# EAGLE board invert-opamp (EAGLE 9.5.1)
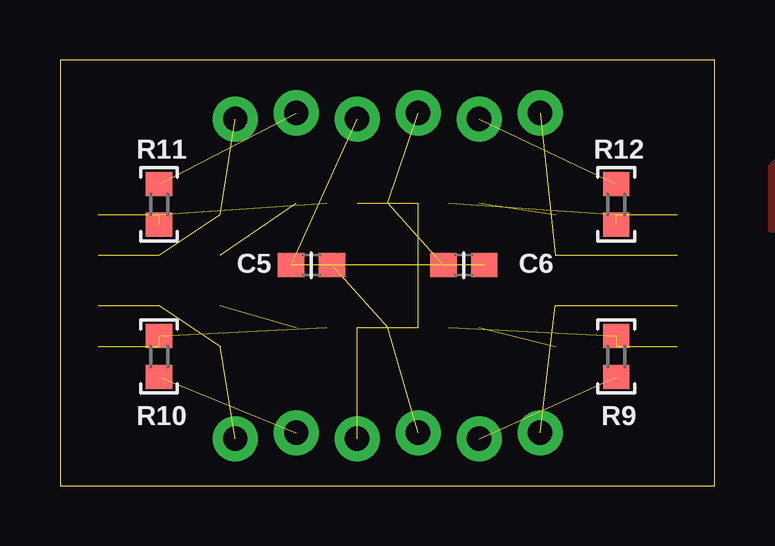
[diagram p0: board, top side]
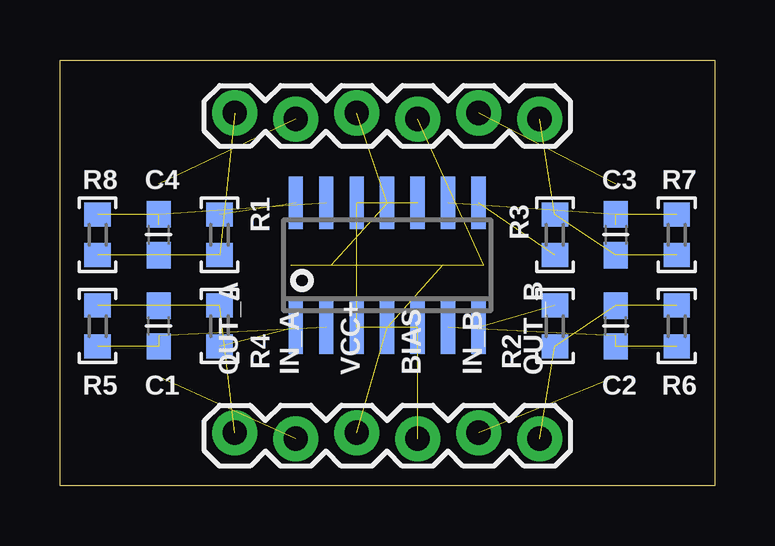
[diagram p1: board, bottom side, seen from below]

Size 27.29 x 17.77 mm. Coordinates in mm from the lower left corner, seen from the top.
Outline: 0,0 27.29,0 27.29,17.77 0,17.77 0,0
Copper layers (1*16): Top 0.035mm / dielectric 1.5mm / Bottom 0.035mm
Design rules "default": minimum track width 6mil, minimum drill 0.35mm, track to track 6mil, track to pad 6mil, pad to pad 6mil, via to via 6mil, smd to smd 6mil, copper to edge 40mil, drill to drill 6mil, minimum pad ring 10mil, minimum via ring 8mil, stop-mask expansion 4mil, vias tented up to drill 0mil, thermal gap 10mil

## Footprints (pad centres in the part's own frame; a part is rotated, then mirrored left to right if it is on the bottom)
C0603 = smd 1.1 x 1: 1 -0.85,0; 2 0.85,0
SO14 = smd 0.6 x 2.2: 1 -3.81,-2.6; 2 -2.54,-2.6; 3 -1.27,-2.6; 4 0,-2.6; 5 1.27,-2.6; 6 2.54,-2.6; 7 3.81,-2.6; 8 3.81,2.6; 9 2.54,2.6; 10 1.27,2.6; 11 0,2.6; 12 -1.27,2.6; 13 -2.54,2.6; 14 -3.81,2.6
1X06_LOCK = drill 1.016 pad 1.88: 1 0,0; 2 2.54,-0.254; 3 5.08,0; 4 7.62,-0.254; 5 10.16,0; 6 12.7,-0.254
R0603 = smd 1 x 1.1: 1 -0.85,0; 2 0.85,0

## Placement (x,y rotation side)
C1  18pF  [C0603]  23.18,6.67 90 bottom
C2  18pF  [C0603]  4.13,6.67 90 bottom
C3  18pF  [C0603]  4.13,10.48 270 bottom
C4  18pF  [C0603]  23.18,10.48 270 bottom
C5  [C0603]  10.48,9.21 0 top
C6  [C0603]  16.83,9.21 0 top
IC1  OPAMP-TL074D  [SO14]  13.65,9.21 0 bottom
J1  [1X06_LOCK]  20,2.22 0 bottom
J2  [1X06_LOCK]  20,15.56 0 bottom
R1  220R  [R0603]  20.64,6.67 90 bottom
R2  220R  [R0603]  6.67,6.67 270 bottom
R3  220R  [R0603]  6.67,10.48 90 bottom
R4  220R  [R0603]  20.64,10.48 270 bottom
R5  100k  [R0603]  25.72,6.67 90 bottom
R6  100k  [R0603]  1.59,6.67 90 bottom
R7  100k  [R0603]  1.59,10.48 270 bottom
R8  100k  [R0603]  25.72,10.48 270 bottom
R9  24k  [R0603]  23.18,5.4 90 top
R10  24k  [R0603]  4.13,5.4 90 top
R11  24k  [R0603]  4.13,11.75 270 top
R12  24k  [R0603]  23.18,11.75 270 top

## Library data of the parts
C1-C6 IC1 R1-R12 = 0000-master
J1 J2 = SparkFun-Connectors

## Nets
IN_A: J1.2 R9.1
IN_B: J1.5 R10.1
IN_C: J2.5 R11.1
IN_D: J2.2 R12.1
N$1: C1.1 IC1.2 R5.1 R9.2
N$2: IC1.1 R1.1
N$4: IC1.8 R3.1
N$5: C2.1 IC1.6 R6.1 R10.2
N$6: IC1.7 R2.1
N$8: C3.1 IC1.9 R7.1 R11.2
N$10: C4.1 IC1.13 R8.1 R12.2
N$11: IC1.14 R4.1
OUT_A: C1.2 J1.1 R1.2 R5.2
OUT_B: C2.2 J1.6 R2.2 R6.2
OUT_C: C3.2 J2.6 R3.2 R7.2
OUT_D: C4.2 J2.1 R4.2 R8.2
PE: C5.1 C6.2 J2.4
VCC+: C5.2 IC1.4 J1.3
VCC-: C6.1 IC1.11 J2.3
VREF: IC1.3 IC1.5 IC1.10 IC1.12 J1.4

## Tracks (layer width: path | path; a pad name or v marks a point on that pad's centre or on a via)
IN_A  (1 unrouted)
IN_B  (1 unrouted)
IN_C  (1 unrouted)
IN_D  (1 unrouted)
N$1  (3 unrouted)
N$2  (1 unrouted)
N$4  (1 unrouted)
N$5  (3 unrouted)
N$6  (1 unrouted)
N$8  (3 unrouted)
N$10  (3 unrouted)
N$11  (1 unrouted)
NEG_SILK1
  pour Top: 42.23,10.64 43.5,10.64 43.5,13.34 42.86,13.97 42.23,13.34
NEG_SILK2
  pour Top: 34.61,10.64 35.88,10.64 35.88,13.34 34.61,13.34
NEG_SILK3
  pour Top: 37.15,10.64 38.42,10.64 38.42,13.34 37.15,13.34
NEG_SILK4
  pour Top: 29.53,10.64 30.8,10.64 30.8,13.34 30.16,13.97 29.53,13.34
NEG_SILK5
  pour Top: 33.34,13.34 32.07,13.34 32.07,10.64 32.7,10 33.34,10.64
NEG_SILK6
  pour Top: 40.96,13.34 39.69,13.34 39.69,10.64 40.32,10 40.96,10.64
OUT_A  (3 unrouted)
OUT_B  (3 unrouted)
OUT_C  (3 unrouted)
OUT_D  (3 unrouted)
PE  (2 unrouted)
VCC+  (2 unrouted)
VCC-  (2 unrouted)
VREF  (4 unrouted)

## Text on the board
tPlace: QUAD INVERT / OP-AMP
bPlace: OUT_B | IN_B | BIAS | VCC+ | IN_A | OUT_A
tRestrict: OUT C | IN C | GND | VCC- | IN D | OUT D